# EAGLE board BusinessCardTemplate (EAGLE 8.2.1)
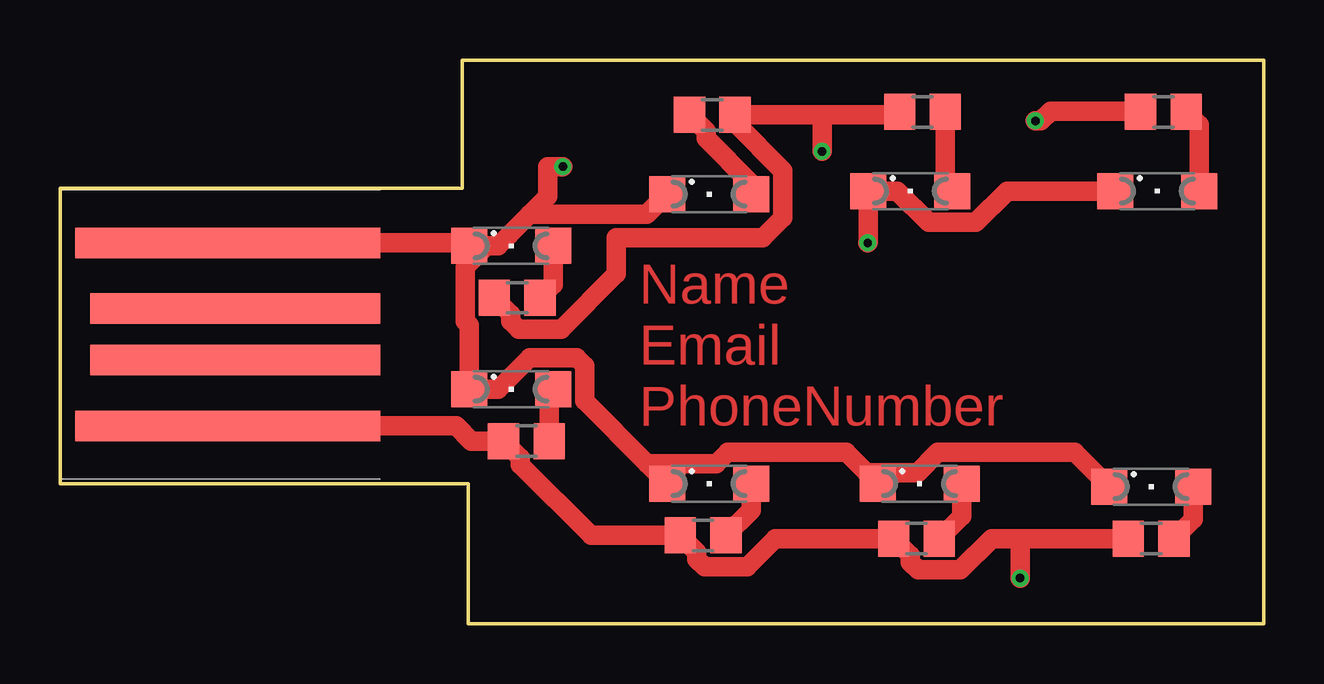
[diagram p0: board, top side]
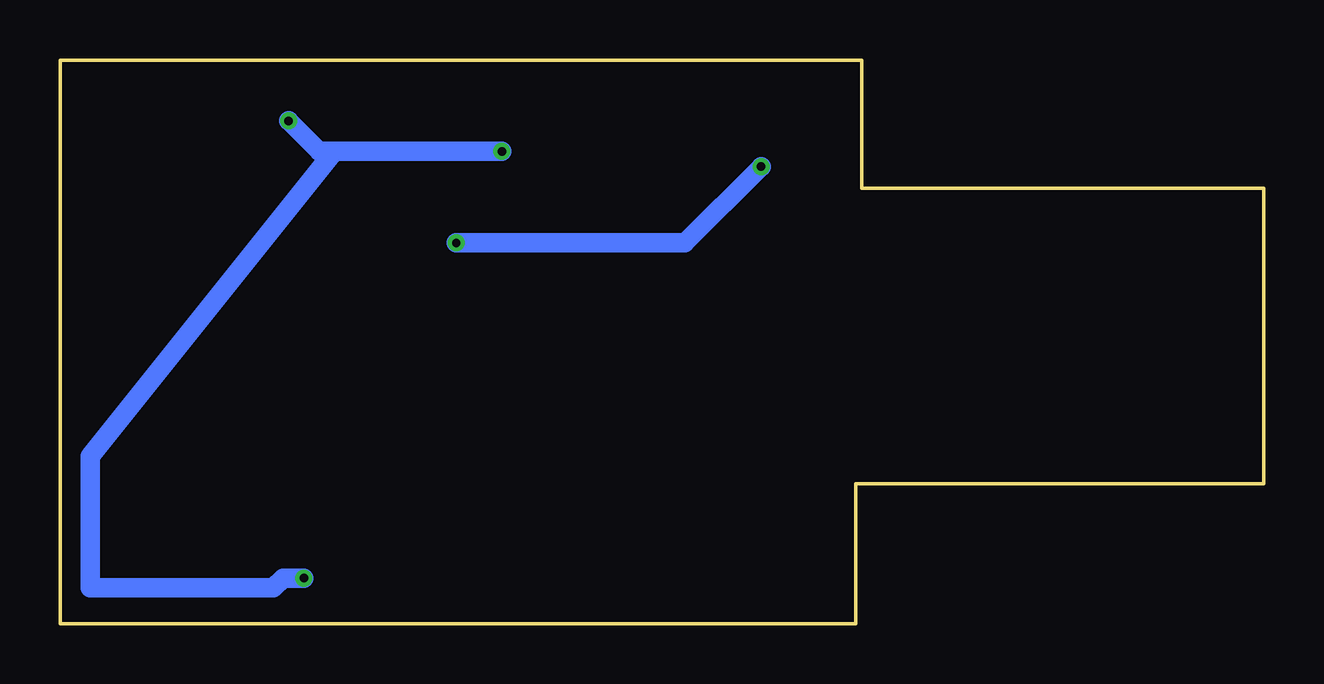
[diagram p1: board, bottom side, seen from below]

Size 50.16 x 23.5 mm. Coordinates in mm from the lower left corner, seen from the top.
Outline: 0,18.16 0,5.84 17.02,5.84 17.02,0 50.16,0 50.16,23.5 16.76,23.5 16.76,18.16 0,18.16
Copper layers (1*16): Top 0.0356mm / dielectric 1.5011mm / Bottom 0.0356mm
Design rules "LaenPCBOrder": minimum track width 6mil, minimum drill 13mil, track to track 6mil, track to pad 6mil, pad to pad 6mil, via to via 6mil, smd to smd 6mil, copper to edge 15mil, drill to drill 6mil, minimum pad ring 7mil, minimum via ring 7mil, stop-mask expansion 3mil, vias tented up to drill 0mil, thermal gap 10mil

## Footprints (pad centres in the part's own frame; a part is rotated, then mirrored left to right if it is on the bottom)
SML1206 = smd 1.5 x 1.5: A 1.75,0; C -1.75,0
R0805 = smd 1.3 x 1.5: 1 -0.95,0; 2 0.95,0
PCB_USB = smd 1.27 x 12.065: DM 2.731,6.032; DP 4.889,6.032 | smd 1.27 x 12.7: GND 7.62,6.35; V 0,6.35

## Placement (x,y rotation side)
LED1  [SML1206]  18.8,15.75 0 top
LED2  [SML1206]  18.8,9.78 0 top
LED3  [SML1206]  27.05,5.84 0 top
LED4  [SML1206]  35.81,5.84 0 top
LED5  [SML1206]  45.47,5.71 0 top
LED6  [SML1206]  45.72,18.03 0 top
LED7  [SML1206]  35.43,18.03 0 top
LED8  [SML1206]  27.05,17.91 0 top
R1  [R0805]  19.05,13.59 180 top
R2  [R0805]  19.43,7.62 180 top
R3  [R0805]  26.8,3.68 180 top
R4  [R0805]  35.69,3.56 180 top
R5  [R0805]  45.47,3.56 180 top
R6  [R0805]  45.97,21.34 180 top
R7  [R0805]  35.94,21.34 180 top
R8  [R0805]  27.18,21.21 0 top
U$1  PCB_USBNOBACK  [PCB_USB]  13.34,8.26 90 top

## Library data of the parts
LED1-LED8 = led
R1-R8 = resistor
U$1 = pcb_usb

## Nets
GND: LED1.C LED2.C LED3.C LED4.C LED5.C LED6.C LED7.C LED8.C U$1.GND
N$1: R1.2 R2.2 R3.2 R4.2 R5.2 R6.2 R7.2 R8.2 U$1.V
N$2: LED1.A R1.1
N$3: LED2.A R2.1
N$4: LED3.A R3.1
N$5: LED4.A R4.1
N$6: LED5.A R5.1
N$7: LED6.A R6.1
N$8: LED7.A R7.1
N$9: LED8.A R8.1

## Tracks (layer width: path | path; a pad name or v marks a point on that pad's centre or on a via)
GND  (via drill 0.35)
  Top 0.813: U$1.GND 16.92,15.88 LED1.C 17.78,15.75 | LED8.C 24.45,17.06 19.57,17.06 18.72,16.21 | 17.78,15.75 18.26,15.75 18.72,16.21 | LED6.C 39.47,18.03 38.16,16.73 36.2,16.73 34.89,18.03 LED7.C 33.68,15.9 v33.66,15.88 | 24.46,6.68 21.85,9.29 21.85,10.76 21.53,11.09 19.56,11.09 18.26,9.78 LED2.C 17.05,12.45 16.89,12.61 16.89,14.86 17.78,15.75 | 24.46,6.68 LED3.C | 18.72,16.21 20.32,17.81 20.32,19.05 v20.95,19.05 | 24.46,6.68 27.35,6.68 27.82,7.15 32.76,7.15 33.61,6.3 | 33.61,6.3 LED4.C | 33.61,6.3 35.73,6.3 36.58,7.15 42.28,7.15 LED5.C
  Bottom 0.813: v20.95,19.05 24.13,15.88 v33.66,15.88
N$1  (via drill 0.35)
  Top 0.813: R7.2 34.86,21.21 31.75,21.21 | 31.75,21.21 R8.2 28.13,20.87 30.11,18.89 30.11,16.93 29.28,16.09 23.18,16.09 23.18,14.58 20.88,12.28 19.12,12.28 18.79,12.61 18.79,12.9 R1.2 | U$1.V 16.51,8.26 17.14,7.62 R2.2 19.17,6.93 19.17,6.64 22.13,3.68 R3.2 26.54,2.99 26.54,2.7 26.87,2.37 28.63,2.37 29.81,3.56 R4.2 35.43,2.87 35.43,2.57 35.76,2.25 37.52,2.25 38.83,3.56 40.01,3.56 | R6.2 45,21.36 41.27,21.36 40.87,20.96 v40.64,20.96 | v31.75,19.68 31.75,21.21 | 40.01,3.56 R5.2 | v40.01,1.91 40.01,3.56
  Bottom 0.813: v40.64,20.96 39.37,19.68 38.73,19.68 | 38.73,19.68 v31.75,19.68 | 38.73,19.68 48.9,6.98 48.9,1.5 41.27,1.5 40.87,1.91 v40.01,1.91
N$2
  Top 0.813: R1.1 20.55,14.14 LED1.A
N$3
  Top 0.813: LED2.A 20.38,9.61 R2.1
N$4
  Top 0.813: R3.1 28.8,4.74 LED3.A
N$5
  Top 0.813: R4.1 37.56,4.48 LED4.A
N$6
  Top 0.813: R5.1 47.22,4.36 LED5.A
N$7
  Top 0.813: LED6.A 47.47,20.79 R6.1
N$8
  Top 0.813: LED7.A 36.89,18.33 R7.1
N$9
  Top 0.813: R8.1 26.92,20.52 26.92,20.23 28.8,18.35 LED8.A

## Text on the board
Top: Name | Email | PhoneNumber
tStop: Name | Email | PhoneNumber